# Altium PCB Power_Protection_Test_Board_(Small_Trace_Widths).PcbDoc
Units mm, origin at the board's own origin, x right, y up, seen from the top; angles counter-clockwise.
Board outline 23 x 15 mm, 2 copper layers (Top Layer, Bottom Layer); 9 components, 4 nets, 17 pads, 0 vias.
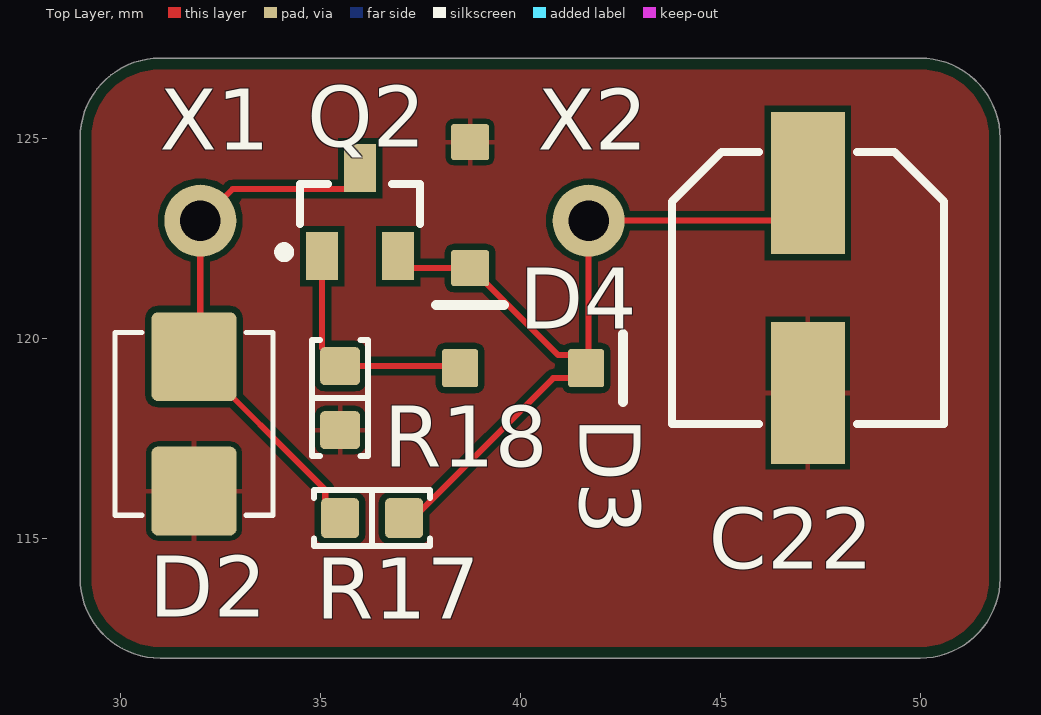
[diagram p0: Top Layer view]
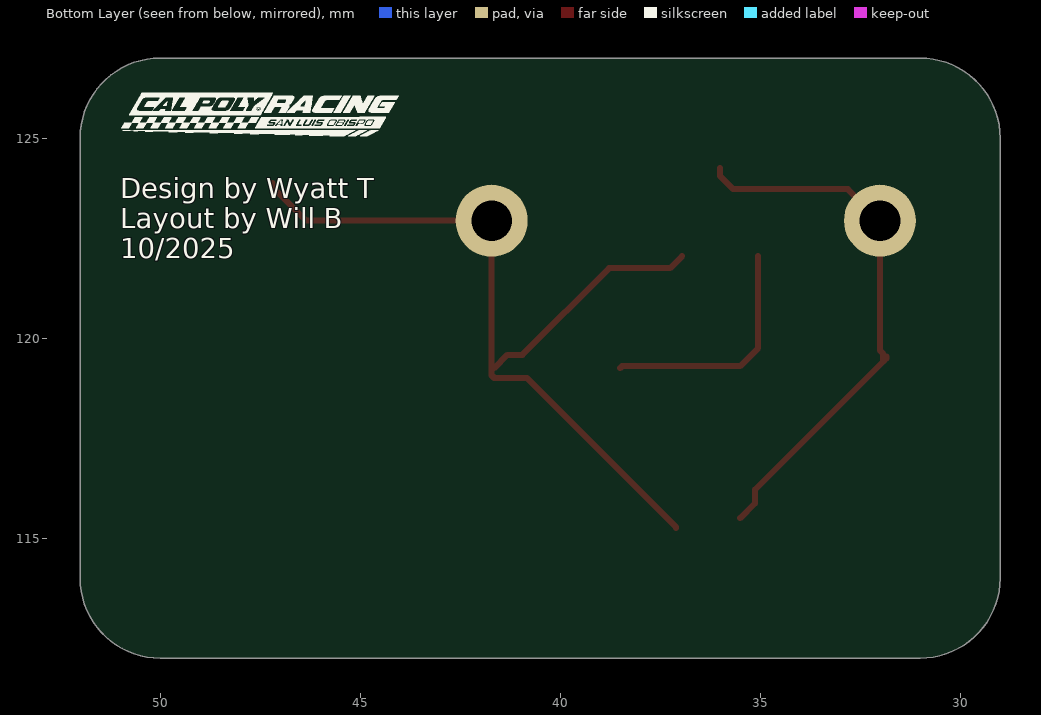
[diagram p1: Bottom Layer view, seen from below]
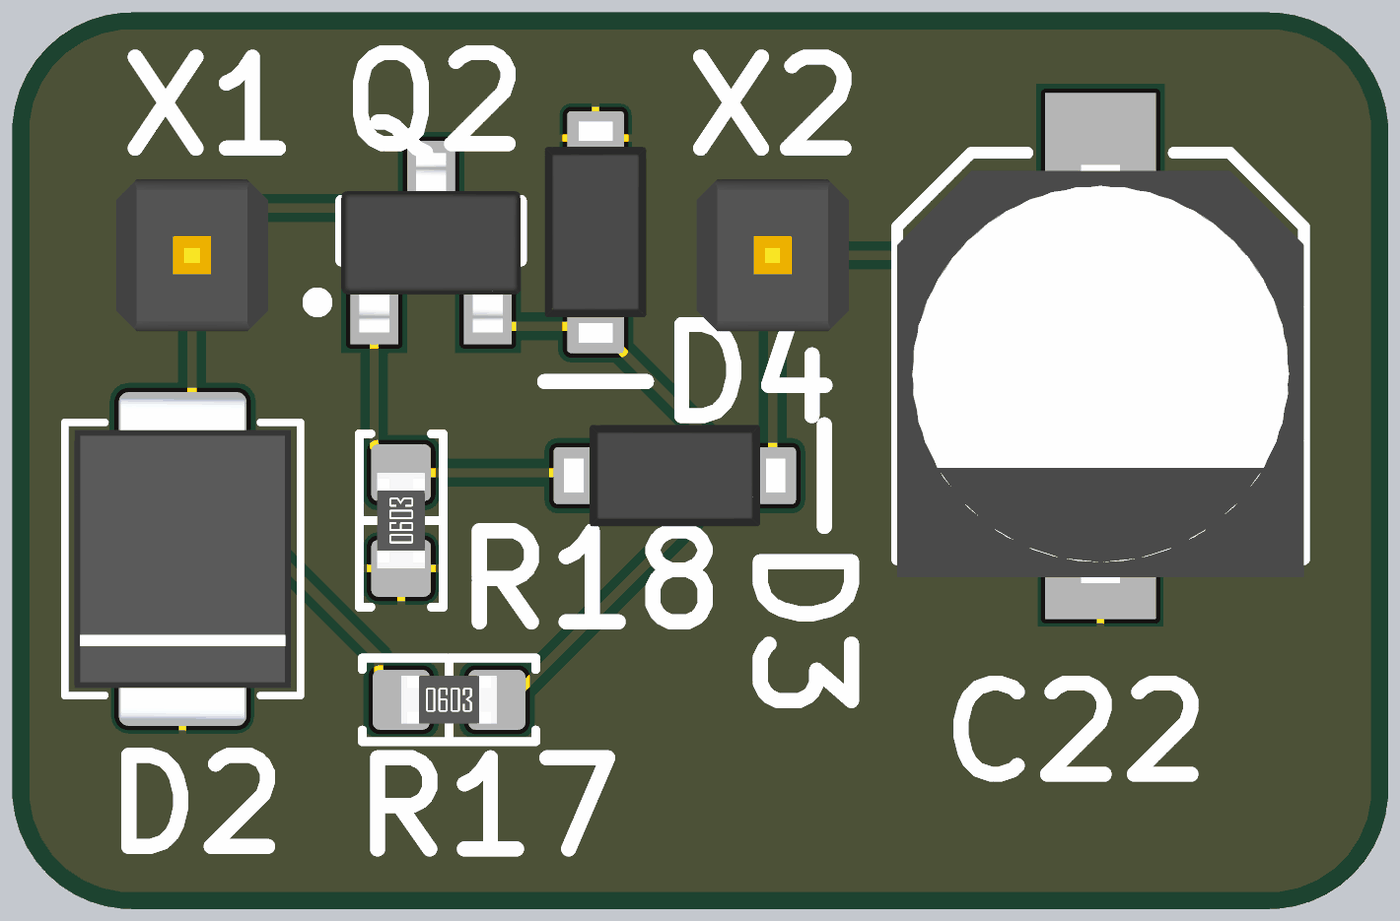
[diagram p2: 3D render of the assembled board from above, using the file's embedded part models]

## Layer stack, top to bottom
Top Solder: solder mask 0.0102, Solder Resist, Dk 3.5
Top Layer: signal copper 0.0356
Dielectric 1: dielectric 0.32, FR-4, Dk 4.8
Bottom Layer: signal copper 0.0356
Bottom Solder: solder mask 0.0102, Solder Resist, Dk 3.5

## Board outline
31,112 cw(c31,114) 29,114 29,125 cw(c31,125) 31,127 50,127 cw(c50,125) 52,125 52,114 cw(c50,114) 50,112

## Design rules (kind name [scope] priority, off if disabled: settings)
BoardOutlineClearance [All] p1: gap=0.2 ignorepadtopadclearanceinfootprint=FALSE except(0.254: Arc-CutoutEdge Poly-CutoutEdge; 0.279: Arc-OutlineEdge Poly-OutlineEdge)
Clearance [All] p1: gap=0.127 ignorepadtopadclearanceinfootprint=FALSE except(0.152: Arc-Fill Arc-Poly Arc-Region Track-Fill Track-Poly Track-Region SMDPad-Fill SMDPad-Poly SMDPad-Region THPad-Fill THPad-Poly THPad-Region Via-Fill Via-Poly Via-Region Fill-Fill Fill-Poly Fill-Region Poly-Poly Poly-Region Region-Region; 0.25: Arc-Hole Track-Hole SMDPad-Hole THPad-Hole Via-Hole Fill-Hole Poly-Hole Region-Hole Text-Hole)
ComponentClearance [All] p1: gap=0.127 collisioncheckmode=3 verticalgap=0.127 showdistances=TRUE
DiffPairsRouting [All] p1: maxlimit=0.254 minlimit=0.127 mostfreqgap=0.127 toplayer_minwidth=0.127 toplayer_maxwidth=25.4 toplayer_prefwidth=0.127 bottomlayer_minwidth=0.127 bottomlayer_maxwidth=25.4 bottomlayer_prefwidth=0.127 maxuncoupledlength=12.7
Height [All] p1: minheight=0 maxheight=1816.048 prefheight=12.7
HoleSize [All] p1: absolutevalues=TRUE maxlimit=6.3 minlimit=0.3 maxpercent=80.000 minpercent=20.000
HoleToHoleClearance [All] p1: gap=0.25 allowstackedmicrovias=FALSE
MinimumAnnularRing [All] p1: minimumring=0.076
MinimumSolderMaskSliver [All] p1: minsoldermaskwidth=0
PlaneClearance [All] p1: clearance=0.127
PlaneConnect PlaneConnectPowerPads [InPadClass('PowerPads')] p1: planeconnectstyle=Direct reliefexpansion=0.508 reliefentries=4 reliefconductorwidth=0.254 reliefairgap=0.254
PlaneConnect [All] p2: pad.planeconnectstyle=Relief pad.reliefexpansion=0.3 pad.reliefentries=4 pad.reliefconductorwidth=0.127 pad.reliefairgap=0.127 via.planeconnectstyle=Direct via.reliefexpansion=0.3 via.reliefentries=4 via.reliefconductorwidth=0.127 via.reliefairgap=0.127
PolygonConnect PolygonConnectPowerPads [All vs (InPadClass('PowerPads'))] p1: connectstyle=Direct reliefconductorwidth=0.254 reliefentries=4 polygonreliefangle="90 Angle" airgapwidth=0.254
PolygonConnect [All] p2: thpad.connectstyle=Relief thpad.reliefconductorwidth=0.127 thpad.reliefentries=4 thpad.polygonreliefangle="90 Angle" thpad.airgapwidth=0.127 smdpad.connectstyle=Relief smdpad.reliefconductorwidth=0.127 smdpad.reliefentries=4 smdpad.polygonreliefangle="90 Angle" smdpad.airgapwidth=0.127 via.connectstyle=Direct via.reliefconductorwidth=0.127 via.reliefentries=4 via.polygonreliefangle="90 Angle" via.airgapwidth=0.127
RoutingVias [All] p1: holewidth=0.3 width=0.6 viastyle="Through Hole" minholewidth=0.3 minwidth=0.6 maxholewidth=0.6 maxwidth=6.6
SilkToSilkClearance [All] p1: silktosilkclearance=0
SilkToSolderMaskClearance [IsPad] p1: minsilkscreentomaskgap=0.127 clearancetoexposedcopper=TRUE
SolderMaskExpansion [All] p1: expansion=0.075 istentingtop=FALSE
Width [All] p1: maxlimit=25.4 minlimit=0.127 preferedwidth=0.127 minimp=50.000000 maximp=50.000000 favimp=50.000000
20 further rules are at their usual default settings.

## Components (designator, comment, footprint, x,y, rotation, side; value= is the part's Value field where it differs from the comment)
C22 "865080343009" 6.60x6.60x8.00mm_E_CAP 47.194,121.252 r270 top value=100u
D2 "SMBJ13CA-E3/52" SMBJ13CA-E3/52 31.847,117.856 r90 top
D3 "MMSZ5231B-7-F" SOD-123 40.075,119.25 r180 top
D4 "MMSZ5231B-7-F" SOD-123 38.75,123.325 r90 top
Q2 "MOSFET P-CH 30V 2A SOT-23" SOT23-3 36,123.15 r90 top
R17 "Resistor" 0603_RES 36.3,115.5 r0 top value=DNP
R18 "Resistor" 0603_RES 35.5,118.5 r90 top value=1M
X1 "GenericPinHeader(0.1in)" GenericPinHeader(.1in) 32.004,122.936 r0 top
X2 "GenericPinHeader(0.1in)" GenericPinHeader(.1in) 41.712,122.936 r0 top

## Footprints (in the part's own frame and the unit in brackets; to place one, negate y for a bottom-side part, rotate by r counter-clockwise, add the part's x,y. Pads: shape width x height; smd on the part's side, far side on the other; paste and mask are expansions set on the pad)
6.60x6.60x8.00mm_E_CAP [mm] "Aluminum Electrolytic Capacitor, Body 6.60x6.60x8.00mm, IPC Low Density"
  rect 3.55x1.85 smd: 1(-2.625,0) 2(2.625,0)
  silkscreen extent -3.4,-3.4 3.4,3.4, body extent -3.2,-3.4 3.8,3.4, height 8
0603_RES [mm] "Chip Resistor, 2-Leads, Body 1.60x0.80mm, IPC Medium Density"
  rrect25% 0.95x1 smd: 1(-0.8,0) 2(0.8,0)
  silkscreen extent -1.45,-0.7 1.45,0.7, body extent -0.8,-0.4 0.8,0.4, height 0.45
GenericPinHeader(.1in) [mm] "Generic .1in (2.54mm) pin header"
  round 1.8 hole 1.016: 1(0,0)
  body extent -1.27,-1.27 1.27,1.27, height 9.5
SMBJ13CA-E3/52 [mm]
  rrect15% 2.22x2.13 smd: 1(-1.68,0) 2(1.68,0)
  silkscreen extent -2.28,-1.97 2.28,1.97, body extent -2.7,-1.81 2.7,1.81, height 2.44
SOD-123 [mm] "SODFL, 2-Leads, Body 1.55x3.70mm, IPC Medium Density"
  rrect15% 0.9x0.95 smd: 1(-1.575,0) 2(1.575,0)
  silkscreen extent -2.5,-0.85 -2.5,0.85, body extent -1.85,-0.85 1.85,0.85, height 1.35
SOT23-3 [mm] "SOT23, 3-Leads, Body 2.92x2.37mm, Pitch 0.95mm, IPC Medium Density, NUP2105L"
  rect 1.2x0.8 smd: 1(-1.1,0.95) 2(-1.1,-0.95) 3(1.1,0)
  silkscreen extent -1.12,-1.5 0.7,2.02, body extent -1.5,-1.5 1.5,1.5, height 1.25

## Part data
C22: "CAP ALUM 100UF 20% 16V SMD", Percent Tolerance=20, ComponentLink1Description=Digikey, ComponentLink1URL=https://www.digikey.com/en/products/detail/w%C3%BCrth-elektronik/865080343009/5728014
D2: "21.5V Clamp 27.9A Ipp Tvs Diode Surface Mount DO-214AA (SMBJ). Bidirectional", Package=DO-214AA, ComponentLink1Description=Digikey, ComponentLink1URL=https://www.digikey.com/en/products/detail/vishay-general-semiconductor-diodes-division/SMBJ13CA-E3-52/1119222?s=N4IgTCBcDaIMoFkBCApAjAZgMIEEC0AohgPQCsEAugL5A, Vr=13V
D3 D4: "Zener Diode 5.1V 500mW ±5% Surface Mount SOD-123", Package=SOD-123, ComponentLink1Description=Digikey, ComponentLink1URL=https://www.digikey.com/en/products/detail/diodes-incorporated/MMSZ5231B-7-F/755472, Num_Circuits=1
Q2: library part STR2P3LLH6, "P-Channel 2A (Ta) 350mW (Tc) Surface Mount SOT-23", Current=2, Package=SOT-23, ComponentLink1Description=Digikey, ComponentLink1URL=https://www.digikey.com/en/products/detail/stmicroelectronics/STR2P3LLH6/5244876, ComponentLink2Description=Datasheet, ComponentLink2URL=https://www.st.com/content/ccc/resource/technical/document/datasheet/96/4a/55/9d/3c/16/47/d6/DM00084050.pdf/files/DM00084050.pdf/jcr:content/translations/en.DM00084050.pdf, Num_Circuits=1, RdsOn=56, Type="P Channel", VdsMax=30, VgsMax=20, Vt=10
X1 X2: "Generic .1in(2.54mm) pitch pin header"

## Nets (pads, with @x,y where several pads share a name; then routed paths per layer and width w, separated by ;. In a path a pad name is that pad's centre, name@x,y a point inside that pad or via, vN(x,y) a via of type N, cw(c..) or ccw(c..) an arc to the next point about the centre after c; other vN are vias at no path point)
GND: C22.2 D2.1 D4.2 R18.1
NetC22_1: C22.1 D3.1 D4.1 Q2.2 R17.2 X2.1 | length 21.9
  Top Layer w0.152: Q2.2 37.25,121.75 D4.1 38.775,121.75 40.944,119.581 41.319,119.581 D3.1 ; R17.2@37.1,115.25 37.1,115.275 40.825,119 D3.1@41.65,119 ; D3.1@41.65,119.025 D3.1@41.65,119 ; C22.1 47.194,123.785 46.345,122.936 X2.1 41.712,119.062 D3.1@41.65,119
NetD2_2: D2.2 Q2.3 R17.1 X1.1 | length 13.8
  Top Layer w0.152: D2.2 D2.2@31.847,119.491 ; D2.2@31.903,119.435 D2.2@31.847,119.491 ; D2.2@31.925,119.458 31.925,119.615 32.004,119.693 X1.1 32.02,122.936 32.81,123.726 35.676,123.726 36,124.05 Q2.3 ; R17.1 35.127,115.873 35.127,116.211 D2.2@31.847,119.491
NetD3_2: D3.2 Q2.1 R18.2 | length 6
  Top Layer w0.152: Q2.1 35.05,119.748 R18.2 R18.2 38.45,119.3 D3.2

## Polygon pours and split planes (outlines as drawn)
GND on Top Layer "NONET_L01_P-001" (solid, pour order 0): 31,112 cw(c31,114) 29,114 29,125 cw(c31,125) 31,127 50,127 cw(c50,125) 52,125 52,114 cw(c50,114) 50,112

## Silkscreen, mask and mechanical layers (free items; w line width, h text height)
Bottom Overlay:
  drawing of 32 lines, arcs and shapes, not listed
  text "Design by Wyatt T / Layout by Will B / 10/2025" at 51,122 h0.5
Mechanical 1:
  the board outline again, w0.254